# Altium PCB PCB1.pcbdoc
Units mil, origin at the board's own origin, x right, y up, seen from the top; angles counter-clockwise.
Board outline 3370 x 2125 mil, 2 copper layers (Top Layer, Bottom Layer), stack 62.2 mil thick; 5 components, 5 nets, 16 pads, 1 vias.
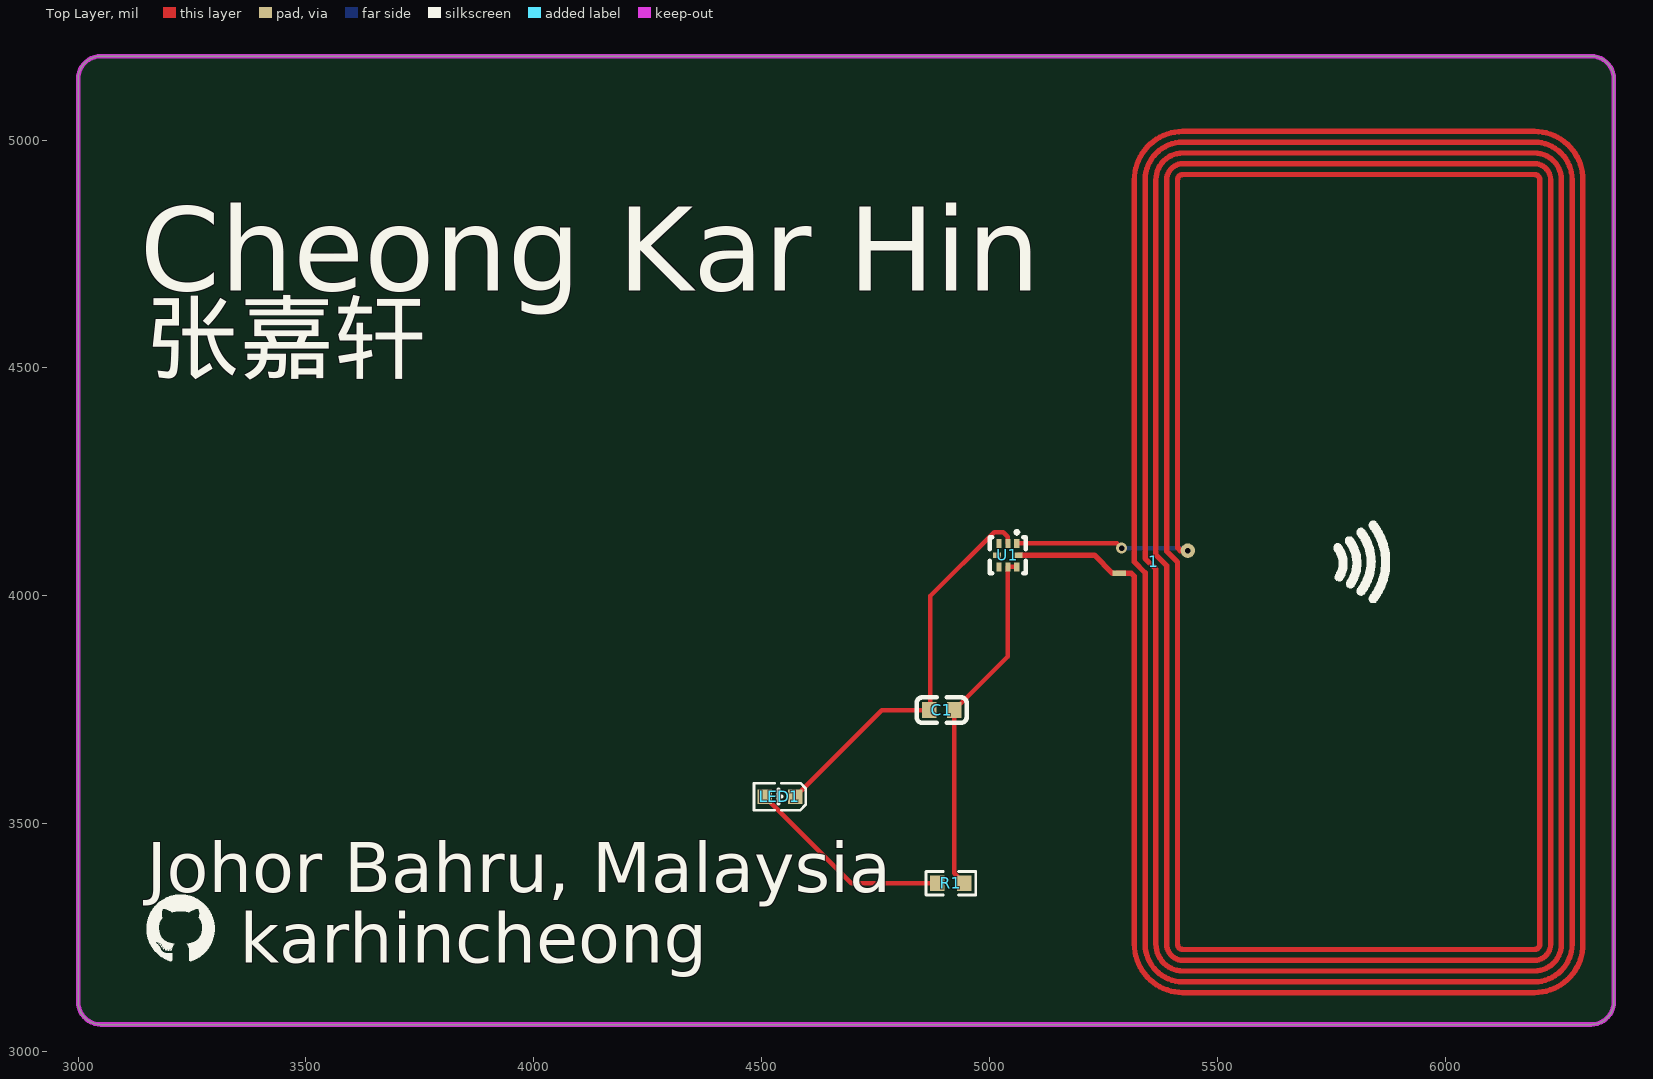
[diagram p0: Top Layer view]
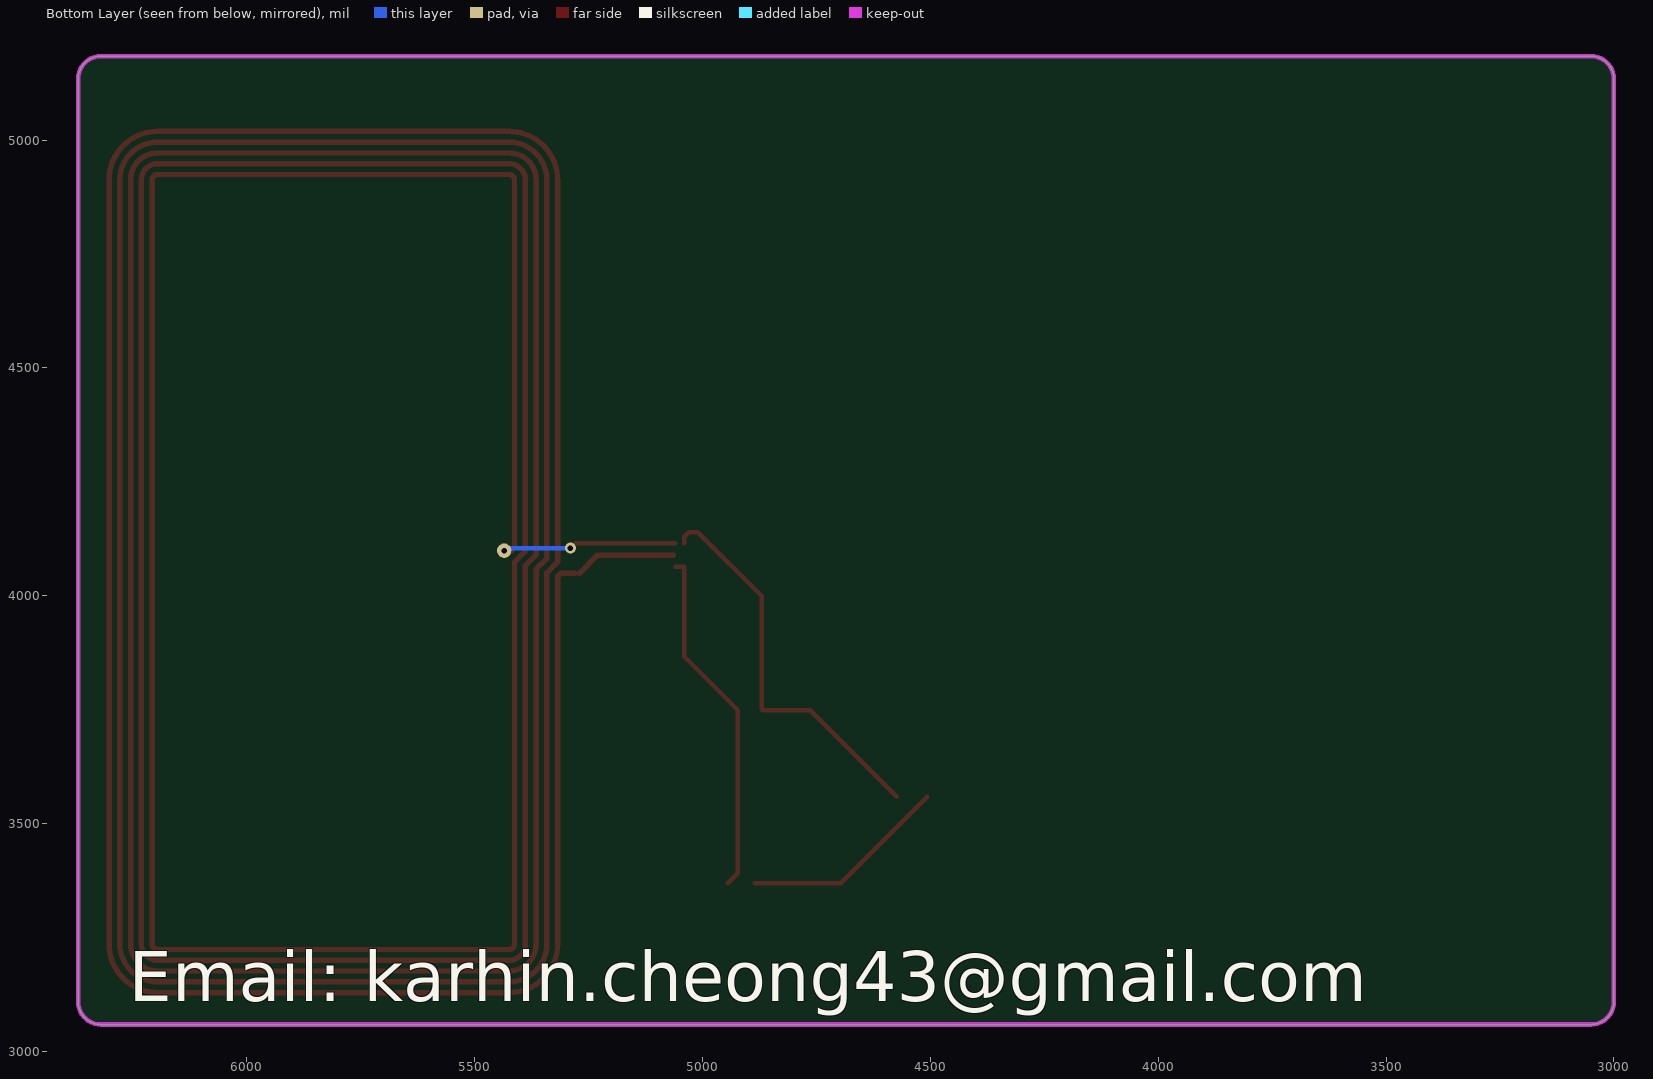
[diagram p1: Bottom Layer view, seen from below]

## Layer stack, top to bottom
Top Solder Mask Layer: solder mask 0.4, Dk 3.3
Top Layer: signal copper 1.4
Dielectric1: surface 59.4, FR4, Dk 4.5
Bottom Layer: signal copper 1.4
Bottom Solder Mask Layer: solder mask 0.4, Dk 3.3

## Board outline
3050,5184.2 ccw(c3050,5134.2) 3000,5134.2 3000,3109.2 ccw(c3050,3109.2) 3050,3059.2 6320,3059.2 ccw(c6320,3109.2) 6370,3109.2 6370,5134.2 ccw(c6320,5134.2) 6320,5184.2

## Design rules (kind name [scope] priority, off if disabled: settings)
BoardOutlineClearance copperThickness1oz [All] p0: genericclearance=10 ignorepadtopadclearanceinfootprint=FALSE except(0: Arc-SplitContinuation Track-SplitContinuation SMDPad-SplitContinuation THPad-SplitContinuation Via-SplitContinuation Fill-SplitContinuation Poly-SplitContinuation Region-SplitContinuation Text-SplitContinuation)
BoardOutlineClearance copperThickness2oz [All] p0: genericclearance=10 ignorepadtopadclearanceinfootprint=FALSE except(0: Arc-SplitContinuation Track-SplitContinuation SMDPad-SplitContinuation THPad-SplitContinuation Via-SplitContinuation Fill-SplitContinuation Poly-SplitContinuation Region-SplitContinuation Text-SplitContinuation)
BoardOutlineClearance otherClearance [All] p0: genericclearance=10 ignorepadtopadclearanceinfootprint=FALSE except(0: Arc-SplitContinuation Track-SplitContinuation SMDPad-SplitContinuation THPad-SplitContinuation Via-SplitContinuation Fill-SplitContinuation Poly-SplitContinuation Region-SplitContinuation Text-SplitContinuation)
Clearance copperThickness1oz [All] p1: gap=7 ignorepadtopadclearanceinfootprint=FALSE
Clearance copperThickness2oz [All] p1: gap=7 ignorepadtopadclearanceinfootprint=FALSE
Clearance otherClearance [All] p1: gap=7 ignorepadtopadclearanceinfootprint=FALSE
DiffPairsRouting differentialPair [All] p1: maxuncoupledlength=10 minlimit=6 maxlimit=Infinity mostfreqgap=6 toplayer_minwidth=5 toplayer_prefwidth=10 toplayer_maxwidth=100 bottomlayer_minwidth=5 bottomlayer_prefwidth=10 bottomlayer_maxwidth=100
PasteMaskExpansion pasteMaskExpansion [All] p1: expansion=0
PlaneConnect innerPlane [All] p1: planeconnectstyle=Relief reliefexpansion=20 reliefentries=4 reliefconductorwidth=10 reliefairgap=10
PolygonConnect copperRegion [All] p1: connectstyle=Relief reliefentries=4 reliefconductorwidth=10 polygonreliefangle="90 Angle" airgapwidth=10
RoutingVias viaSize [All] p1: viastyle="Through Hole" holewidth=12.0078 minholewidth=11.811 maxholewidth=248.0314 width=12.0078 minwidth=11.811 maxwidth=248.0314
SolderMaskExpansion solderMaskExpansion [IsVia] p1: useseparateexpansions=TRUE expansion=-1000 expansionbottom=-1000
SolderMaskExpansion solderMaskExpansion [All] p2: useseparateexpansions=TRUE expansion=2 expansionbottom=2
Width copperThickness1oz [All] p1: maxlimit=100 minlimit=5 preferedwidth=10
Width copperThickness2oz [All] p1: maxlimit=100 minlimit=8 preferedwidth=10

## Components (designator, comment, footprint, x,y, rotation, side; value= is the part's Value field where it differs from the comment)
1 "25X48MM_NFC_ANTENNA" 25X48MM_NFC_ANTENNA 5810,4074.2 r90 top
C1 "100nF" C0603 4895,3749.2 r180 top
LED1 "Yellow LED" LED0603-R-RD 4540,3559.2 r180 top
R1 "10K" R0603 4915,3369.2 r0 top
U1 "13.56MHz" XQFN-8_L1.6-W1.6-P0.50-BL_NT3H2111W0FHKH 5040,4089.2 r180 top

## Footprints (in the part's own frame and the unit in brackets; to place one, negate y for a bottom-side part, rotate by r counter-clockwise, add the part's x,y. Pads: shape width x height; smd on the part's side, far side on the other; paste and mask are expansions set on the pad)
25X48MM_NFC_ANTENNA [mil]
  rect 11.8x29.5 smd paste+0 mask+4: P1(-25,525)
  round 31.8 hole 11.8 paste+0 mask+4: P2(25,375)
  Top Layer lines w11.8: -25,530 -25,525 -25,498.6 -31.5,492.1 -838.6,492.1 -847.4,491.8 -856.1,490.7 -864.7,488.9 -873.1,486.4 -881.3,483.2 -889.2,479.3 -896.7,474.8 -903.9,469.7 -910.6,464 -916.8,457.8 -922.5,451.1 -927.6,444 -932.1,436.4 -936,428.5 -939.1,420.3 -941.7,411.9 -943.5,403.3 -944.5,394.6 -944.9,385.8 -944.9,-385.8 -944.5,-394.6 -943.5,-403.3 -941.7,-411.9 -939.1,-420.3 -936,-428.5 -932.1,-436.4 -927.6,-444 -922.5,-451.1 -916.8,-457.8 -910.6,-464 -903.9,-469.7 -896.7,-474.8 -889.2,-479.3 -881.3,-483.2 -873.1,-486.4 -864.7,-488.9 -856.1,-490.7 -847.4,-491.8 -838.6,-492.1 838.6,-492.1 847.3,-491.8 856,-490.7 864.6,-488.9 873.1,-486.4 881.3,-483.2 889.1,-479.3 896.7,-474.8 903.8,-469.7 910.5,-464 916.8,-457.8 922.4,-451.1 927.5,-444 932,-436.4 935.9,-428.5 939.1,-420.3 941.6,-411.9 943.4,-403.3 944.5,-394.6 944.9,-385.8 944.9,385.8 944.5,394.6 943.4,403.3 941.6,411.9 939.1,420.3 935.9,428.5 932,436.4 927.5,444 922.4,451.1 916.8,457.8 910.5,464 903.8,469.7 896.7,474.8 889.1,479.3 881.3,483.2 873.1,486.4 864.6,488.9 856,490.7 847.3,491.8 838.6,492.1 0,492.1 -23.6,468.5 -838.6,468.5 -846.7,468.1 -854.7,466.9 -862.6,464.9 -870.2,462.2 -877.6,458.7 -884.5,454.6 -891.1,449.7 -897.1,444.3 -902.5,438.3 -907.3,431.8 -911.5,424.8 -915,417.5 -917.7,409.8 -919.7,402 -920.9,393.9 -921.3,385.8 -921.3,-385.8 -920.9,-393.9 -919.7,-402 -917.7,-409.8 -915,-417.5 -911.5,-424.8 -907.3,-431.8 -902.5,-438.3 -897.1,-444.3 -891.1,-449.7 -884.5,-454.6 -877.6,-458.7 -870.2,-462.2 -862.6,-464.9 -854.7,-466.9 -846.7,-468.1 -838.6,-468.5 838.6,-468.5 846.7,-468.1 854.7,-466.9 862.6,-464.9 870.2,-462.2 877.5,-458.7 884.5,-454.6 891,-449.7 897,-444.3 902.5,-438.3 907.3,-431.8 911.5,-424.8 914.9,-417.5 917.7,-409.8 919.6,-402 920.8,-393.9 921.2,-385.8 921.2,385.8 920.8,393.9 919.6,402 917.7,409.8 914.9,417.5 911.5,424.8 907.3,431.8 902.5,438.3 897,444.3 891,449.7 884.5,454.6 877.5,458.7 870.2,462.2 862.6,464.9 854.7,466.9 846.7,468.1 838.6,468.5 7.8,468.5 -15.8,444.9 -838.6,444.9 -845.2,444.5 -851.7,443.4 -858.1,441.6 -864.2,439 -870,435.8 -875.4,432 -880.4,427.6 -884.8,422.7 -888.6,417.2 -891.8,411.5 -894.4,405.3 -896.2,399 -897.3,392.4 -897.7,385.8 -897.7,-385.8 -897.3,-392.4 -896.2,-399 -894.4,-405.3 -891.8,-411.5 -888.6,-417.2 -884.8,-422.7 -880.4,-427.6 -875.4,-432 -870,-435.8 -864.2,-439 -858.1,-441.6 -851.7,-443.4 -845.2,-444.5 -838.6,-444.9 838.6,-444.9 845.2,-444.5 851.7,-443.4 858.1,-441.6 864.2,-439 870,-435.8 875.4,-432 880.3,-427.6 884.7,-422.7 888.6,-417.2 891.8,-411.5 894.3,-405.3 896.1,-399 897.2,-392.4 897.6,-385.8 897.6,385.8 897.2,392.4 896.1,399 894.3,405.3 891.8,411.5 888.6,417.2 884.7,422.7 880.3,427.6 875.4,432 870,435.8 864.2,439 858.1,441.6 851.7,443.4 845.2,444.5 838.6,444.9 15.7,444.9 -7.9,421.3 -838.6,421.3 -843.6,420.9 -848.6,419.8 -853.3,418.1 -857.8,415.6 -861.8,412.6 -865.4,409 -868.4,405 -870.8,400.5 -872.6,395.8 -873.7,390.9 -874,385.8 -874,-385.8 -873.7,-390.9 -872.6,-395.8 -870.8,-400.5 -868.4,-405 -865.4,-409 -861.8,-412.6 -857.8,-415.6 -853.3,-418.1 -848.6,-419.8 -843.6,-420.9 -838.6,-421.3 838.6,-421.3 843.6,-420.9 848.5,-419.8 853.3,-418.1 857.7,-415.6 861.8,-412.6 865.3,-409 868.4,-405 870.8,-400.5 872.5,-395.8 873.6,-390.9 874,-385.8 874,385.8 873.6,390.9 872.5,395.8 870.8,400.5 868.4,405 865.3,409 861.8,412.6 857.7,415.6 853.3,418.1 848.5,419.8 843.6,420.9 838.6,421.3 23.6,421.3 0,397.6 -838.6,397.6 -841.2,397.3 -843.7,396.5 -846,395.1 -847.8,393.2 -849.2,391 -850.1,388.5 -850.4,385.8 -850.4,-385.8 -850.1,-388.5 -849.2,-391 -847.8,-393.2 -846,-395.1 -843.7,-396.5 -841.2,-397.3 -838.6,-397.6 838.6,-397.6 841.2,-397.3 843.7,-396.5 845.9,-395.1 847.8,-393.2 849.2,-391 850.1,-388.5 850.4,-385.8 850.4,385.8 850.1,388.5 849.2,391 847.8,393.2 845.9,395.1 843.7,396.5 841.2,397.3 838.6,397.6 31.5,397.6 25,391.1 25,375
C0603 [mil]
  rect 31.5x35.4 smd: 1(-27.6,0) 2(27.6,0)
  silkscreen extent -55,-28 55,28
LED0603-R-RD [mil]
  rect 31.5x31.5 smd: 1(33.5,0) 2(-33.5,0)
  silkscreen extent -57,-30 57,30
R0603 [mil]
  rect 31.8x34 smd paste-3937 mask+2: 1(-29.7,0) 2(29.7,0)
  silkscreen extent -54,-26 54,26
XQFN-8_L1.6-W1.6-P0.50-BL_NT3H2111W0FHKH [mil]
  rect 11x19.7 smd: 1(-19.7,-25.6) 2(0,-25.6) 3(19.7,-25.6) 5(19.7,25.6) 6(0,25.6) 7(-19.7,25.6)
  rect 17.7x11.8 smd: 4(23.6,0) 8(-23.6,0)
  silkscreen extent -39,-52 39,39

## Via types
v1: diameter 24, hole 12, Top Layer to Bottom Layer, 1 vias

## Nets (pads, with @x,y where several pads share a name; then routed paths per layer and width w, separated by ;. In a path a pad name is that pad's centre, name@x,y a point inside that pad or via, vN(x,y) a via of type N, cw(c..) or ccw(c..) an arc to the next point about the centre after c; other vN are vias at no path point)
$1N2: 1.P1 U1.8 | length 223
  Top Layer w11.8: U1.8 5230,4089.2 5270,4049.2
$1N5: C1.1 R1.2 U1.6 U1.7 | length 771.9
  Top Layer w9.9: C1.1 5040,3866.6 U1.6 U1.7
  Top Layer w10: C1.1 4922.6,3391.3 R1.2
$1N6: C1.2 LED1.2 U1.2 | length 871
  Top Layer w9.9: C1.2 4870,3751.7 4870,3999.6 5010,4139.6 5030,4139.6 5040,4129.6 U1.2
  Top Layer w10: LED1.2 4763.5,3749.2 C1.2
$1N7: LED1.1 R1.1 | length 457.5
  Top Layer w10: LED1.1 4696.5,3369.2 R1.1
$1N9: 1.P2 U1.1 | length 381.8
  Top Layer w9.9: U1.1 5279.7,4114.8 v1(5289.7,4104.8)
  Bottom Layer w9.9: v1(5289.7,4104.8) 5429.4,4104.8 1.P2
pads on no net: U1.3 U1.4 U1.5

## Keep-outs
Board Outline Layer:
  the board outline again, w10

## Silkscreen, mask and mechanical layers (free items; w line width, h text height)
Top Silkscreen Layer:
  drawing of 12 lines, arcs and shapes, not listed
  text "Cheong Kar Hin" at 3135,4669.2 h185
  text "张嘉轩" at 3150,4494.2 h150
  text "Johor Bahru, Malaysia" at 3150,3349.2 h110
  text "karhincheong" at 3355,3194.2 h110
Bottom Silkscreen Layer:
  text "Email: karhin.cheong43@gmail.com" at 6259.2,3110 h110